# Altium PCB PCB_1.PcbDoc
Units mm, origin at the board's own origin, x right, y up, seen from the top; angles counter-clockwise.
Board outline 89.53 x 58.42 mm, 2 copper layers (Top Layer, Bottom Layer); 24 components, 16 nets, 62 pads, 11 vias.
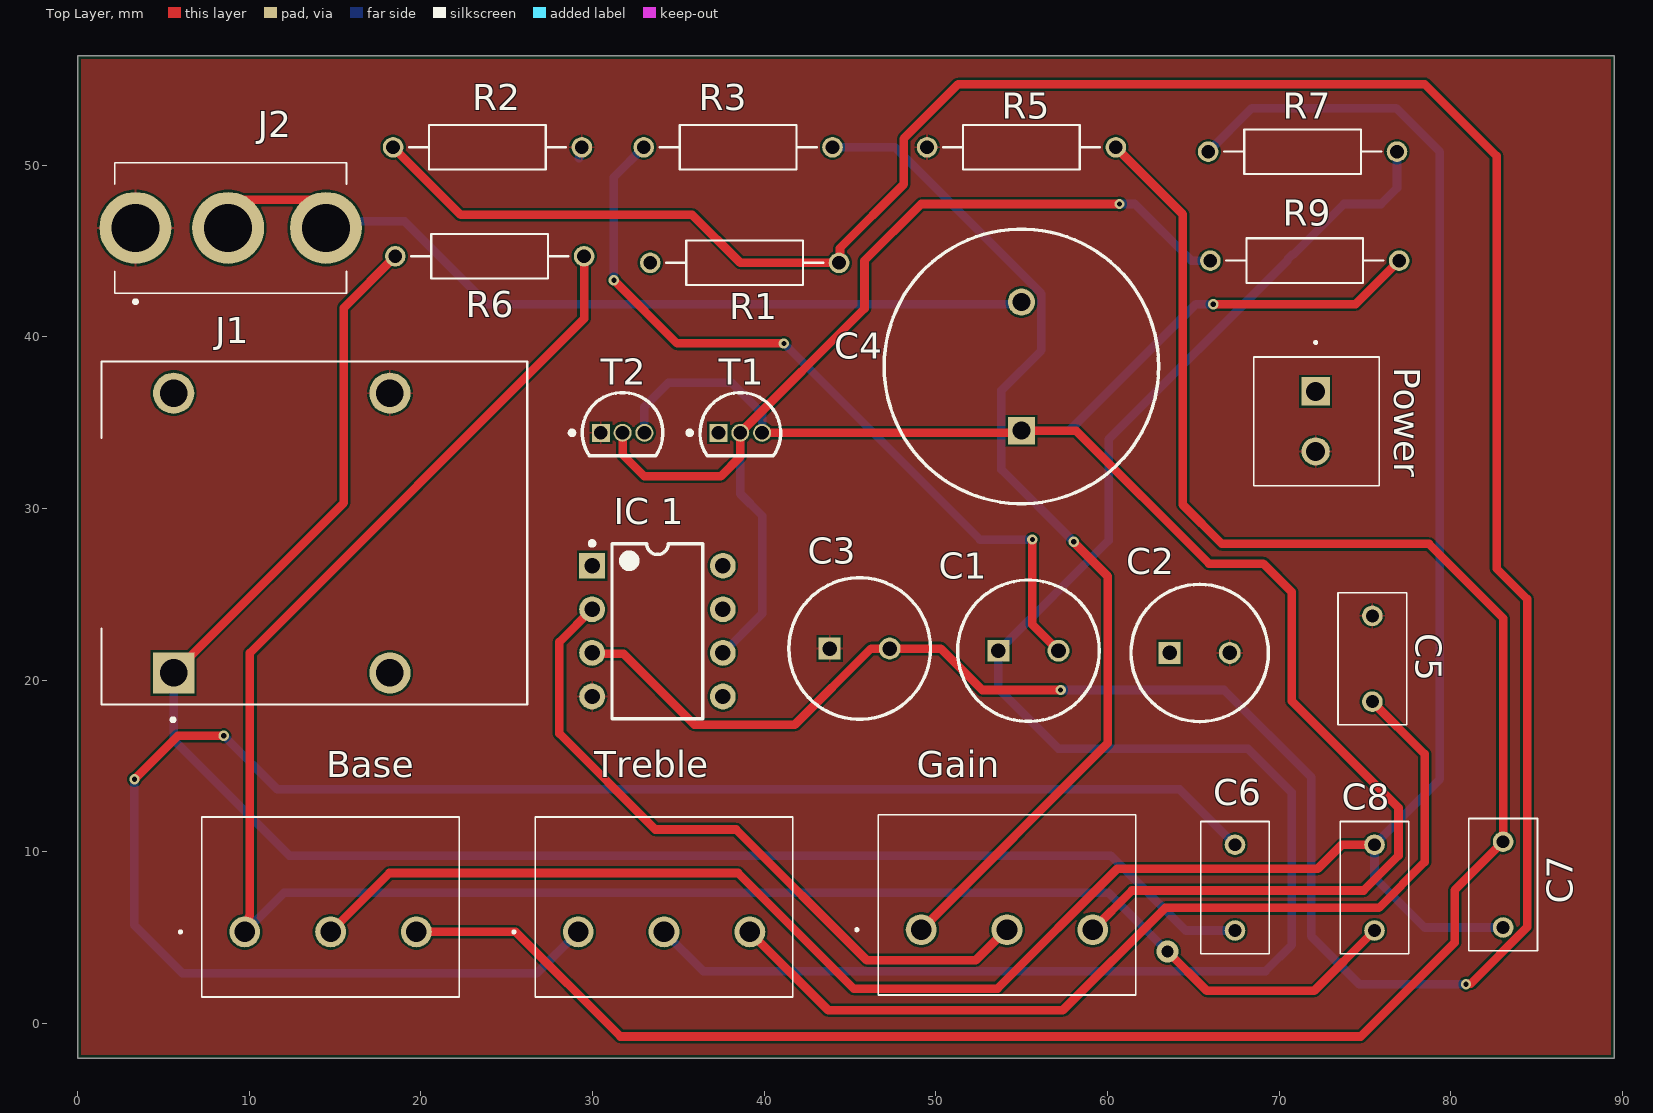
[diagram p0: Top Layer view]
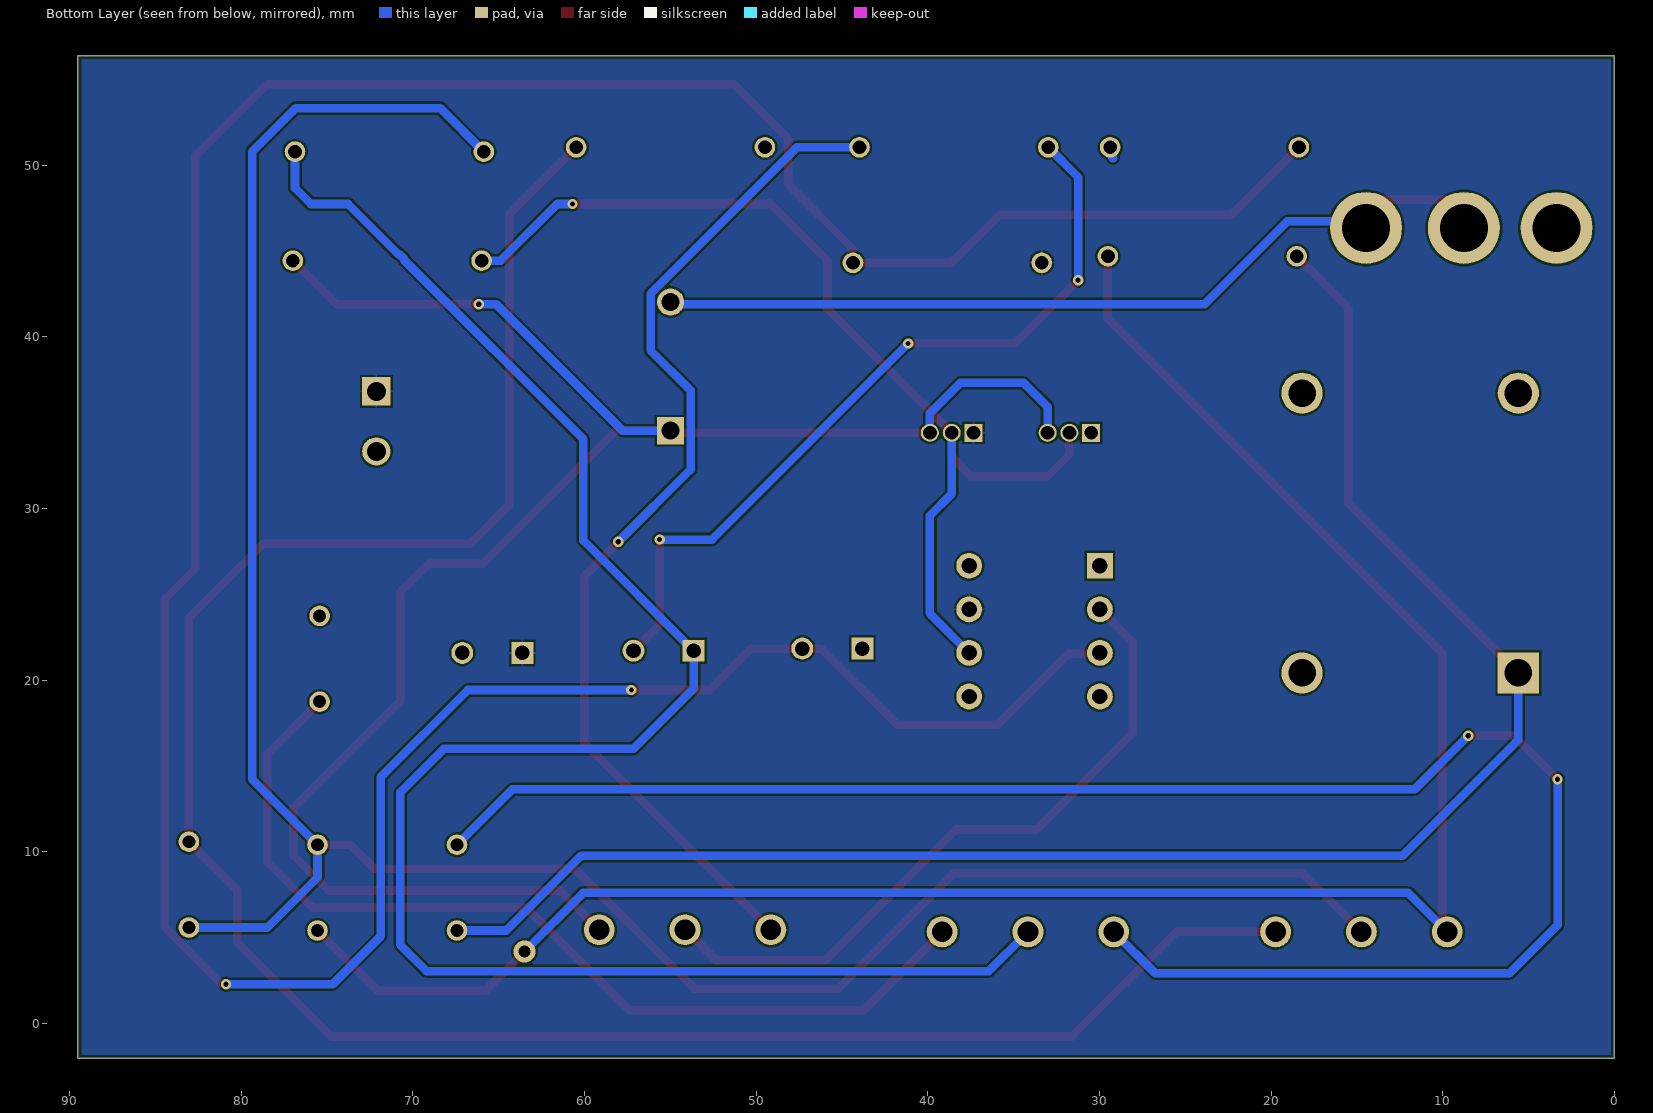
[diagram p1: Bottom Layer view, seen from below]
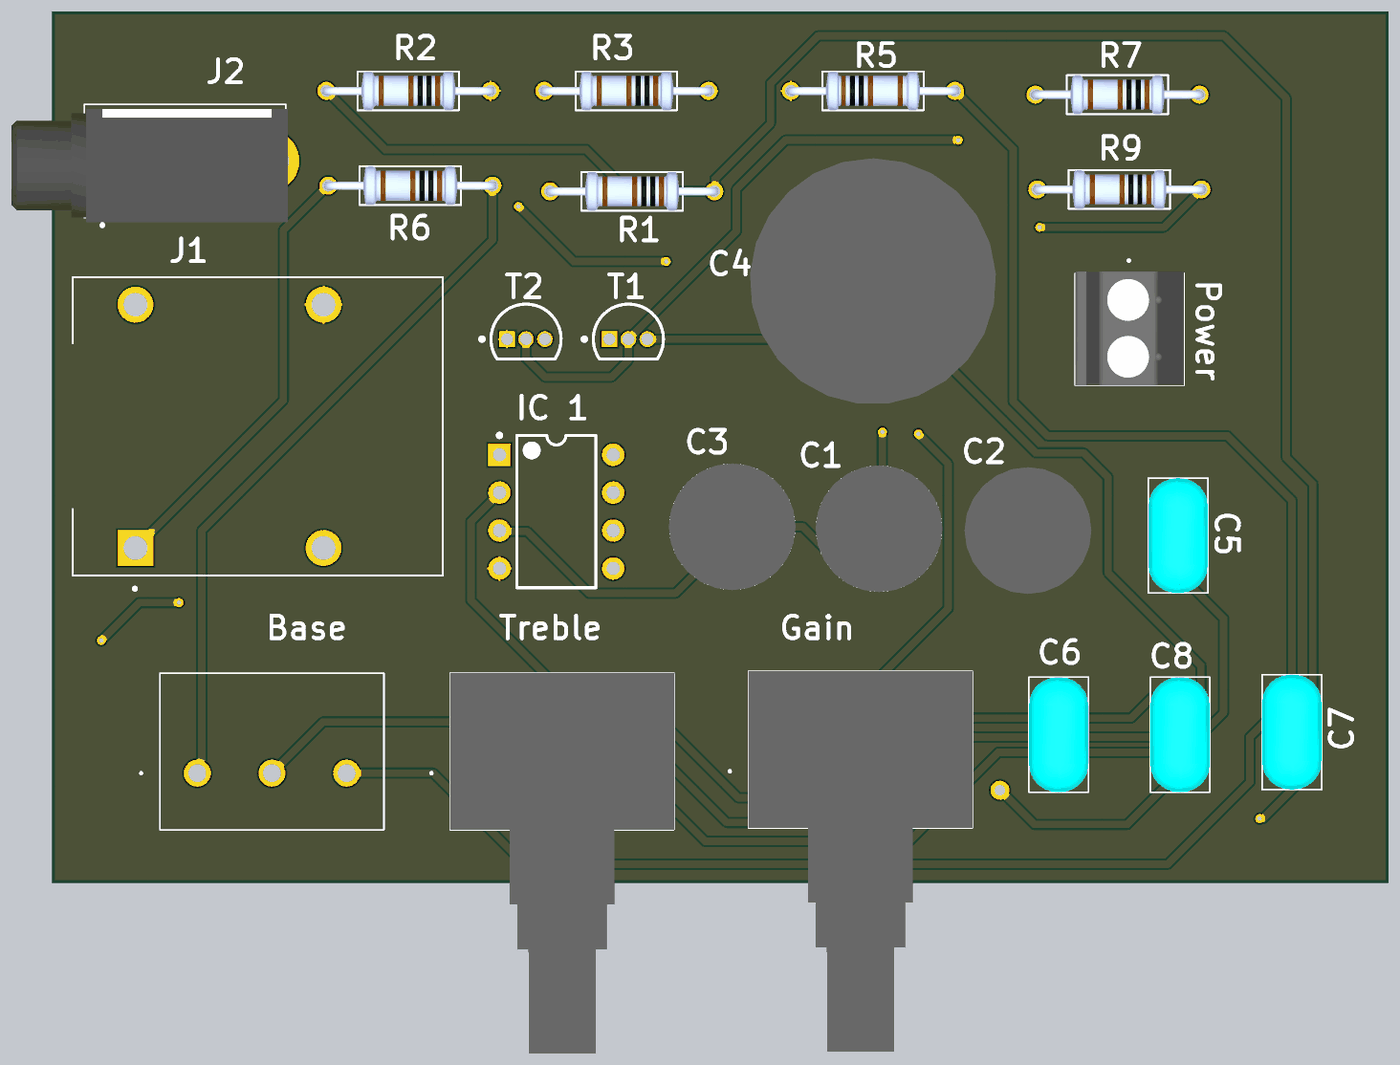
[diagram p2: 3D render of the assembled board from above, using the file's embedded part models]

## Layer stack, top to bottom
Top Solder: solder mask 0.0102, Solder Resist, Dk 3.5
Top Layer: signal copper 0.0356
Dielectric 1: dielectric 0.32, FR-4, Dk 4.8
Bottom Layer: signal copper 0.0356
Bottom Solder: solder mask 0.0102, Solder Resist, Dk 3.5

## Board outline
0,-2.032 89.535,-2.032 89.535,56.388 0,56.388

## Design rules (kind name [scope] priority, off if disabled: settings)
BoardOutlineClearance [All] p1: gap=0.2 ignorepadtopadclearanceinfootprint=FALSE
Clearance [All] p1: gap=0.127 ignorepadtopadclearanceinfootprint=FALSE except(0.25: Arc-Hole Track-Hole SMDPad-Hole THPad-Hole Via-Hole Fill-Hole Poly-Hole Region-Hole Text-Hole)
ComponentClearance [All] p1: gap=0.127 collisioncheckmode=3 verticalgap=0.127 showdistances=TRUE
DiffPairsRouting [All] p1: maxlimit=0.254 minlimit=0.127 mostfreqgap=0.127 toplayer_minwidth=0.127 toplayer_maxwidth=25.4 toplayer_prefwidth=0.127 bottomlayer_minwidth=0.127 bottomlayer_maxwidth=25.4 bottomlayer_prefwidth=0.127 maxuncoupledlength=12.7
Height [All] p1: minheight=0 maxheight=1816.048 prefheight=12.7
HoleSize [All] p1: absolutevalues=TRUE maxlimit=6.3 minlimit=0.3 maxpercent=80.000 minpercent=20.000
HoleToHoleClearance [All] p1: gap=0.25 allowstackedmicrovias=FALSE
MinimumAnnularRing [All] p1: minimumring=0.076
MinimumSolderMaskSliver [All] p1: minsoldermaskwidth=0
PlaneClearance [All] p1: clearance=0.127
PlaneConnect PlaneConnectPowerPads [InPadClass('PowerPads')] p1: planeconnectstyle=Direct reliefexpansion=0.508 reliefentries=4 reliefconductorwidth=0.254 reliefairgap=0.254
PlaneConnect [All] p2: pad.planeconnectstyle=Relief pad.reliefexpansion=0.3 pad.reliefentries=4 pad.reliefconductorwidth=0.127 pad.reliefairgap=0.127 via.planeconnectstyle=Direct via.reliefexpansion=0.3 via.reliefentries=4 via.reliefconductorwidth=0.127 via.reliefairgap=0.127
PolygonConnect PolygonConnectPowerPads [All vs (InPadClass('PowerPads'))] p1: connectstyle=Direct reliefconductorwidth=0.254 reliefentries=4 polygonreliefangle="90 Angle" airgapwidth=0.254
PolygonConnect [All] p2: thpad.connectstyle=Relief thpad.reliefconductorwidth=0.127 thpad.reliefentries=4 thpad.polygonreliefangle="90 Angle" thpad.airgapwidth=0.127 smdpad.connectstyle=Relief smdpad.reliefconductorwidth=0.127 smdpad.reliefentries=4 smdpad.polygonreliefangle="90 Angle" smdpad.airgapwidth=0.127 via.connectstyle=Direct via.reliefconductorwidth=0.127 via.reliefentries=4 via.polygonreliefangle="90 Angle" via.airgapwidth=0.127
RoutingVias [All] p1: holewidth=0.3 width=0.6 viastyle="Through Hole" minholewidth=0.3 minwidth=0.6 maxholewidth=0.6 maxwidth=6.6
SilkToSilkClearance [All] p1: silktosilkclearance=0
SilkToSolderMaskClearance [IsPad] p1: minsilkscreentomaskgap=0.127 clearancetoexposedcopper=TRUE
SolderMaskExpansion [All] p1: expansion=0.075 istentingtop=FALSE
Width [All] p1: maxlimit=0.5 minlimit=0.5 preferedwidth=0.5 minimp=50.000000 maximp=50.000000 favimp=50.000000
20 further rules are at their usual default settings.

## Components (designator, comment, footprint, x,y, rotation, side; value= is the part's Value field where it differs from the comment)
Base "RK1631110TBK" RK1631110TBK 9.732,5.334 r270 top
C1 "2.2uF" CAPPRD350W65D825H1250 53.65,21.717 r0 top
C2 "470uF" CAPPRD350W65D800H2200 63.627,21.59 r0 top
C3 "47uF" CAPPRD350W65D825H1250 43.815,21.844 r0 top
C4 "1000uF" CAPPRD750W85D1600H2200 54.991,34.537 r90 top
C5 "22nF" RCE7U2J943JUB1H03B 75.438,18.749 r90 top
C6 "2.2nF" RCE7U2J943JUB1H03B 67.437,5.414 r90 top
C7 "220nF" RCE7U2J943JUB1H03B 83.058,5.588 r90 top
C8 "22nF" RCE7U2J943JUB1H03B 75.565,5.414 r90 top
Gain "RK1631110TBK" RK1631110TBK 49.149,5.461 r270 top
"IC 1" "OPA134PA" P0008A 33.782,22.86 r0 top
J1 "SJ-63072J" CUI_SJ-63072J 5.588,28.575 r0 top
J2 "MJ-3502N" MJ3502N 3.363,46.355 r0 top
Power "1985823" 1985823 72.136,36.83 r270 top
R1 "10k" RESAD1100W55L680D260 38.862,44.323 r180 top
R2 "10k" RESAD1100W55L680D260 23.876,51.054 r180 top
R3 "10k" RESAD1100W55L680D260 38.481,51.054 r180 top
R5 "1k" RESAD1100W55L680D260 54.991,51.054 r0 top
R6 "1k" RESAD1100W55L680D260 24.003,44.704 r180 top
R7 "1k" RESAD1100W55L680D260 71.374,50.8 r180 top
R9 "560" RESAD1100W55L680D260 71.501,44.45 r180 top
T1 "BC547B" ONSC-TO-92-3-29-11 38.608,34.417 r0 top
T2 "BC557BG" ONSC-TO-92-3-29-11 31.75,34.417 r0 top
Treble "RK1631110TBK" RK1631110TBK 29.163,5.334 r270 top

## Footprints (in the part's own frame and the unit in brackets; to place one, negate y for a bottom-side part, rotate by r counter-clockwise, add the part's x,y. Pads: shape width x height; smd on the part's side, far side on the other; paste and mask are expansions set on the pad)
1985823 [mm]
  rect 1.65x1.65 hole 1.1: 1(0,0)
  round 1.65 hole 1.1: 2(3.5,0)
  silkscreen extent -2.9,-3.6 5.5,3.7, body extent -2.12,-3.6 5.5,3.7, height 9.06
CAPPRD350W65D800H2200 [mm]
  rect 1.275x1.275 hole 0.85: 1(0,0)
  round 1.275 hole 0.85: 2(3.5,0)
  silkscreen extent -2.25,-4 5.75,4, body extent -2.49,-4.25 6,4.25, height 22
CAPPRD350W65D825H1250 [mm]
  rect 1.275x1.275 hole 0.85: 1(0,0)
  round 1.275 hole 0.85: 2(3.5,0)
  silkscreen extent -2.38,-4.12 5.87,4.12, body extent -2.49,-4.25 6,4.25, height 12.5
CAPPRD750W85D1600H2200 [mm]
  rect 1.575x1.575 hole 1.05: 1(0,0)
  round 1.575 hole 1.05: 2(7.5,0)
  silkscreen extent -4.25,-8 11.75,8, body extent -4.5,-8.24 12,8.24, height 22
CUI_SJ-63072J [mm]
  rect 2.4x2.4 / inner round 2.4 / far side rect 2.4x2.4 hole 1.6: 1(0,-8.15)
  round 2.4 hole 1.6: 2(12.6,-8.15) 4(0,8.15) 5(12.6,8.15)
  silkscreen extent -4.2,-10.98 20.6,10
MJ3502N [mm]
  round 4.193 hole 2.795: 1(0,0) 2(5.4,0) 3(11.1,0)
  silkscreen extent -1.2,-4.4 12.3,3.8, body extent -6.07,-4.1 12.43,3.5, height 11.3
ONSC-TO-92-3-29-11 [mm] "TO, 3-Leads, Body Dia 4.7mm, Pitch 1.27mm"
  rect 1.05x1.05 hole 0.8: 1(-1.27,0)
  round 1.05 hole 0.8: 2(0,0) 3(1.27,0)
  silkscreen extent -3.07,-1.34 2.35,2.35, body extent -2.35,-1.33 2.36,2.36, height 7.87
P0008A [mm] "DIP, 8-Leads, Body 10.15x6.6mm, Pitch 2.54mm"
  rect 1.5x1.5 hole 0.9: 1(-3.81,3.81)
  round 1.5 hole 0.9: 2(-3.81,1.27) 3(-3.81,-1.27) 4(-3.81,-3.81) 5(3.81,-3.81) 6(3.81,-1.27) 7(3.81,1.27) 8(3.81,3.81)
  silkscreen extent -3.93,-5.1 2.65,5.23, body extent -3.95,-5.07 3.95,5.07, height 5.08
RCE7U2J943JUB1H03B [mm]
  round 1.2 hole 0.75: 1(0,0) 2(5,0)
  silkscreen extent -1.35,-2 6.35,2, body extent -1.35,-2 6.35,2, height 15.5
RESAD1100W55L680D260 [mm]
  round 1.2 hole 0.8: 1(-5.5,0) 2(5.5,0)
  silkscreen extent -4.58,-1.3 4.58,1.3, body extent -5.77,-1.3 5.77,1.3, height 2.6
RK1631110TBK [mm]
  round 1.8 hole 1.2: 1(0,0) 2(0,5) 3(0,10)
  silkscreen extent -6.7,-3.8 3.8,12.5, body extent -6.7,-2.5 18.8,12.5, height 0.25

## Part data
Base Gain Treble: "Variable Resistor", Manufacturer_Name="ALPS Electric", Mouser Part Number=688-RK1631110TBK, Datasheet Link=https://componentsearchengine.com/Datasheets/1/RK1631110TBK.pdf, Height=20.5mm, Manufacturer_Part_Number=RK1631110TBK, Mouser Price/Stock=https://www.mouser.co.uk/ProductDetail/Alps-Alpine/RK1631110TBK?qs=fQ8kcZGzY5WavbseZCL41A%3D%3D
C1: library part ECA-2VM2R2BJ, "Capacitor", Manufacturer_Name=Panasonic, Mouser Part Number=667-ECA-2VM2R2BJ, Datasheet Link=https://media.digikey.com/pdf/Data%20Sheets/Panasonic%20Electronic%20Components/ECA-xxM%20Series,TypeA.pdf, Height=12.5mm, Manufacturer_Part_Number=ECA-2VM2R2BJ, Mouser Price/Stock=https://www.mouser.co.uk/ProductDetail/Panasonic/ECA-2VM2R2BJ?qs=rMMd5vBiahqKzQ1w%252BG2Zjw%3D%3D
C2: library part EEU-FR1V471LB, "Capacitor Polarised", Manufacturer_Name=Panasonic, Mouser Part Number=667-EEU-FR1V471LB, Arrow Part Number=EEU-FR1V471LB, Arrow Price/Stock=https://www.arrow.com/en/products/eeu-fr1v471lb/panasonic?region=nac, Datasheet Link=http://industrial.panasonic.com/cdbs/www-data/pdf/RDF0000/ABA0000C1259.pdf, Height=22mm, Manufacturer_Part_Number=EEU-FR1V471LB, Mouser Price/Stock=https://www.mouser.co.uk/ProductDetail/Panasonic/EEU-FR1V471LB?qs=n1SRcuzDZT29cYaqooxsEQ%3D%3D
C3: library part ECA-2AM470BJ, "Capacitor", Manufacturer_Name=Panasonic, Mouser Part Number=667-ECA-2AM470BJ, Arrow Part Number=ECA-2AM470BJ, Arrow Price/Stock=http://www.arrow.com/en/products/eca-2am470bj/panasonic, Datasheet Link=https://media.digikey.com/pdf/Data%20Sheets/Panasonic%20Electronic%20Components/ECA-xxM%20Series,TypeA.pdf, Height=12.5mm, Manufacturer_Part_Number=ECA-2AM470BJ, Mouser Price/Stock=https://www.mouser.co.uk/ProductDetail/Panasonic/ECA-2AM470BJ?qs=rMMd5vBiahqcDuBTilH5Zg%3D%3D
C4: library part EEU-FC1V102S, "Capacitor Polarised", Manufacturer_Name=Panasonic, Mouser Part Number=667-EEU-FC1V102S, Arrow Part Number=EEU-FC1V102S, Arrow Price/Stock=https://www.arrow.com/en/products/eeu-fc1v102s/panasonic?region=nac, Datasheet Link=http://industrial.panasonic.com/cdbs/www-data/pdf/RDF0000/ABA0000C1209.pdf, Height=22mm, Manufacturer_Part_Number=EEU-FC1V102S, Mouser Price/Stock=https://www.mouser.co.uk/ProductDetail/Panasonic/EEU-FC1V102S?qs=NFmy3EUjRuVoETF2mRqKyQ%3D%3D
C5 C6 C7 C8: library part RDER72J474MUE1H03A, "Capacitor", Manufacturer_Name="Murata Electronics", Mouser Part Number=81-RDER72J474MUE1H3A, Arrow Part Number=RDER72J474MUE1H03A, Arrow Price/Stock=https://www.arrow.com/en/products/rder72j474mue1h03a/murata-manufacturing?region=nac, Datasheet Link=https://psearch.en.murata.com/capacitor/product/RDER72J474MUE1H03A.html, Height=15mm, Manufacturer_Part_Number=RDER72J474MUE1H03A, Mouser Price/Stock=https://www.mouser.co.uk/ProductDetail/Murata-Electronics/RDER72J474MUE1H03A?qs=hNud%2FORuBR3jyvfy30yvdw%3D%3D
"IC 1": library part CMP-0808-00049-2, "SoundPlus(TM) High Performance Audio Operational Amplifier, 5 to 36 V, -40 to 85 degC, 8-pin DIP (P8), Green (RoHS & no Sb/Br)", Manufacturer="Texas Instruments", Code_JEDEC=MS-001, ComponentLink1Description="Manufacturer URL", ComponentLink1URL=http://www.ti.com/, ComponentLink2Description=Datasheet, ComponentLink2URL=http://www.ti.com/general/docs/lit/getliterature.tsp?genericPartNumber=OPA134&fileType=pdf, ComponentLink3Description="Package Specification", ComponentLink3URL=http://www.ti.com/litv/pdf/mpdi001b, DatasheetVersion=SBOS058, Eco-Plan="Green (RoHS & no Sb/Br)", GBW(Typ)(MHz)=8, Iq per channel(Max)(mA)=5, Mounting Technology="Through Hole", Number of Channels=1, PackageDescription="8-Pin Plastic In-Line, Body 9.59 x 6.35 mm, Pitch 2.54 mm", PackageReference=P0008A, PackageVersion="4040082/E, 04/2010", PartNumber=OPA134PA, SubFamily="Audio Operational Amplifier", Vmax(V)=36, Vmin(V)=5, Vn at Flatband(Typ)(nV/rtHz)=8
J1: Package=None, Availability=Unavailable, MP=SJ-63072J, Price=None
J2: "Connector", Manufacturer_Name="CUI Devices", Mouser Part Number=490-MJ-3502N, Arrow Part Number=MJ-3502N, Arrow Price/Stock=https://www.arrow.com/en/products/mj-3502n/cui-devices?region=nac, Datasheet Link=https://www.cui.com/product/resource/mj-3502n.pdf, Height=11.3mm, Manufacturer_Part_Number=MJ-3502N, Mouser Price/Stock=https://www.mouser.co.uk/ProductDetail/CUI-Devices/MJ-3502N?qs=WyjlAZoYn51%252Bghx31AcijA%3D%3D
Power: "Connector", Manufacturer_Name="Phoenix Contact", Mouser Part Number=651-1985823, Arrow Part Number=1985823, Arrow Price/Stock=https://www.arrow.com/en/products/1985823/phoenix-contact?region=nac, Datasheet Link=http://www.phoenixcontact.com/gb/produkte/1985823, Height=8.65mm, Manufacturer_Part_Number=1985823, Mouser Price/Stock=https://www.mouser.co.uk/ProductDetail/Phoenix-Contact/1985823?qs=YbgdthCBnKeJF1NhvxNKlA%3D%3D
R1 R2 R3 R5 R6 R7 R9: library part MFR-25FBF52-1K, "1.07 kOhms Â±1% 0.25W, 1/4W Through Hole Resistor Axial - Metal Film", Package="Axial Yageo", Availability="In Stock", Check_prices=https://www.snapeda.com/parts/MFR-25FBF52-1K/Yageo/view-part/?ref=eda, MF=Yageo, MP=MFR-25FBF52-1K, Price=None, Purchase-URL=https://pricing.snapeda.com/search/part/MFR-25FBF52-1K/?ref=eda, SnapEDA_Link=https://www.snapeda.com/parts/MFR-25FBF52-1K/Yageo/view-part/?ref=snap
T1: library part CMP-1048-01467-1, "Amplifier Transistor, NPN Silicon, 3-Pin TO-92, Bulk Box", Manufacturer="On Semiconductor", ComponentLink1Description="Manufacturer URL", ComponentLink1URL=http://www.onsemi.com/, ComponentLink2Description=Datasheet, ComponentLink2URL=http://www.onsemi.com/pub_link/Collateral/BC546-D.PDF, ComponentLink3Description="Package Specification", ComponentLink3URL=http://www.onsemi.cn/pub_link/Collateral/2N6426-D.PDF, DatasheetVersion="Rev. 7", fT Min (MHz)=150, IC Continuous (A)=0.1, Mounting Technology="Through Hole", PackageDescription="3-Pin Transistor Outline, Body 4.825 x 3.685 mm, Pitch 1.27 mm", PackageReference=TO-92-3-29-11_AM_SL, PackageVersion="Rev. AM", Packing="Bulk Box", PartNumber=BC547B, Polarity=NPN, RoHS=FALSE
T2: library part CMP-1048-01440-1, "Amplifier Transistor, PNP Silicon, 3-Pin TO-92, Pb-Free, Bulk Box", Manufacturer="On Semiconductor", ComponentLink1Description="Manufacturer URL", ComponentLink1URL=http://www.onsemi.com/, ComponentLink2Description=Datasheet, ComponentLink2URL=http://www.onsemi.com/pub_link/Collateral/BC556B-D.PDF, ComponentLink3Description="Package Specification", ComponentLink3URL=http://www.onsemi.cn/pub_link/Collateral/2N6426-D.PDF, DatasheetVersion="Rev. 3", IC Continuous (A)=-0.1, Mounting Technology="Through Hole", PackageDescription="3-Pin Transistor Outline, Body 4.825 x 3.685 mm, Pitch 1.27 mm", PackageReference=TO-92-3-29-11_AM_SL, PackageVersion="Rev. AM", Packing="Bulk Box", PartNumber=BC557BG, Polarity=PNP, RoHS=TRUE

## Via types
v1: diameter 0.6, hole 0.3, Top Layer to Bottom Layer, 10 vias
v2: diameter 1.27, hole 0.711, Top Layer to Bottom Layer, 1 vias

## Nets (pads, with @x,y where several pads share a name; then routed paths per layer and width w, separated by ;. In a path a pad name is that pad's centre, name@x,y a point inside that pad or via, vN(x,y) a via of type N, cw(c..) or ccw(c..) an arc to the next point about the centre after c; other vN are vias at no path point)
GND: "IC 1.4" C2.2 C3.1 C5.2 J1.5 J2.1 Power.2 R2.1 R5.1 T2.1 | length 1.3
  Bottom Layer w0.5: 29.21,50.411 29.242,50.443 29.242,50.92 R2.1 ; T2.1@30.226,34.671 T2.1 ; C5.2 C5.2@75.565,23.876
IN: C6.1 J1.1 R6.2 | length 100
  Top Layer w0.5: J1.1 15.494,30.331 15.494,41.695 R6.2
  Bottom Layer w0.5: J1.1 5.588,16.51 12.319,9.779 60.198,9.779 64.563,5.414 C6.1
NetC1_2: C1.2 R3.2 | length 46.2
  Top Layer w0.5: v1(31.242,43.307) 34.925,39.624 v1(41.148,39.624) ; v1(55.626,28.194) 55.626,23.241 C1.2
  Bottom Layer w0.5: v1(31.242,43.307) 31.242,49.315 R3.2 ; v1(41.148,39.624) 52.578,28.194 v1(55.626,28.194)
NetC3_2: "IC 1.3" C3.2 R1.1 R2.2 | length 193.8
  Top Layer w0.5: R2.2 22.313,47.117 35.814,47.117 38.608,44.323 R1.1 44.416,44.377 44.416,45.178 48.133,48.895 48.133,51.562 51.308,54.737 78.486,54.737 82.677,50.546 82.677,26.51 84.455,24.732 84.455,5.603 81.157,2.305 80.918,2.305 v1(80.899,2.286) ; 29.972,21.59 30.025,21.537 31.803,21.537 35.941,17.399 41.783,17.399 46.228,21.844 C3.2 ; C3.2@47.36,21.844 50.292,21.844 52.705,19.431 v1(57.277,19.431)
  Bottom Layer w0.5: v1(57.277,19.431) 66.802,19.431 71.882,14.351 71.882,5.08 74.676,2.286 v1(80.899,2.286)
"NetIC 1_6": "IC 1.6" R9.2 T1.2 T2.2 | length 60.7
  Top Layer w0.5: T2.2 31.75,33.147 33.02,31.877 37.465,31.877 38.608,33.02 T1.2 38.608,34.423 45.847,41.662 45.847,44.45 49.149,47.752 v1(60.706,47.752)
  Bottom Layer w0.5: 37.592,21.59 39.878,23.876 39.878,29.591 38.608,30.861 T1.2 ; v1(60.706,47.752) 61.595,47.752 64.897,44.45 R9.2
OUT: C4.2 J2.2 J2.3 | length 49.2
  Top Layer w0.5: J2.2@9.144,48.006 J2.3@14.844,48.006
  Bottom Layer w0.5: J2.3@13.574,46.736 19.05,46.736 23.876,41.91 54.864,41.91 C4.2
To-1k: Base.2 C7.1 C8.2 R7.2 | length 136.7
  Top Layer w0.5: Base.2 18.161,8.763 38.481,8.763 45.212,2.032 53.594,2.032 60.579,9.017 72.263,9.017 73.66,10.414 C8.2
  Bottom Layer w0.5: R7.2 68.414,53.34 76.835,53.34 79.375,50.8 79.375,14.224 C8.2 75.565,8.509 78.486,5.588 C7.1
V1_1: Gain.1 R3.1 | length 60.8
  Top Layer w0.5: Gain.1 60.025,16.337 60.025,26.054 58.039,28.04 v1(58.039,28.067)
  Bottom Layer w0.5: R3.1 47.621,51.054 56.156,42.519 56.156,39.221 53.826,36.892 53.826,32.28 v1(58.039,28.067)
V1_2: "IC 1.2" Gain.2 | length 40.3
  Top Layer w0.5: 29.972,24.13 28.067,22.225 28.067,16.891 33.658,11.3 38.357,11.3 45.974,3.683 52.326,3.683 54.104,5.461 Gain.2
V1_3: C4.1 Gain.3 R9.1 T1.3 T2.3 | length 109.3
  Top Layer w0.5: T1.3 54.871,34.417 C4.1 58.173,34.537 65.913,26.797 69.088,26.797 70.739,25.146 70.739,18.789 76.962,12.566 76.962,9.779 74.93,7.747 61.435,7.747 Gain.3 ; v1(66.167,41.91) 74.461,41.91 R9.1
  Bottom Layer w0.5: T2.3 33.02,35.941 34.417,37.338 38.1,37.338 39.878,35.56 T1.3 ; C4.1 57.778,34.537 65.151,41.91 v1(66.167,41.91)
V2_1: C6.2 Treble.1 | length 104.1
  Top Layer w0.5: v1(3.302,14.224) 5.842,16.764 v1(8.509,16.764)
  Bottom Layer w0.5: v1(3.302,14.224) 3.302,5.715 6.096,2.921 26.75,2.921 Treble.1 ; v1@8.7,16.573 11.627,13.646 64.205,13.646 C6.2
V2_2: C1.1 R7.1 Treble.2 | length 108.9
  Bottom Layer w0.5: Treble.2 36.449,3.048 69.215,3.048 70.739,4.572 70.739,13.462 68.199,16.002 57.15,16.002 53.65,19.502 C1.1 60.071,28.138 60.071,34.036 70.504,44.469 70.504,44.538 70.797,44.831 70.866,44.831 73.787,47.752 75.946,47.752 76.874,48.68 R7.1
V2_3: C5.1 Treble.3 | length 55.4
  Top Layer w0.5: Treble.3 43.735,0.762 57.404,0.762 63.373,6.731 75.819,6.731 78.486,9.398 78.486,15.701 C5.1
V3_1: Base.1 C8.1 R6.1 | length 118.2
  Top Layer w0.5: Base.1 9.981,5.583 9.981,6.225 10.033,6.277 10.033,21.59 29.503,41.06 R6.1 ; v2(63.5,4.191) 65.786,1.905 72.056,1.905 C8.1
  Bottom Layer w0.5: Base.1 12.018,7.62 60.071,7.62 v2(63.5,4.191)
V3_3: Base.3 C7.2 R5.2 | length 129.2
  Top Layer w0.5: Base.3 25.527,5.334 31.623,-0.762 74.764,-0.762 80.241,4.715 80.241,7.771 C7.2 83.058,23.622 78.74,27.94 66.675,27.94 64.389,30.226 64.389,47.156 R5.2
VCC: "IC 1.7" C2.1 Power.1 R1.2 T1.1
pads on no net: "IC 1.1" "IC 1.5" "IC 1.8" J1.2 J1.4

## Polygon pours and split planes (outlines as drawn)
VCC on Bottom Layer "VCC_L02_P001" (solid, pour order 1): 0,56.388 89.127,56.388 89.307,56.568 89.307,-1.852 0.407,-1.852 0.28,-1.979 0,-1.698
GND on Top Layer "GND_L01_P000" (solid, pour order 0): -0.13,56.388 89.405,56.388 89.532,56.261 89.532,-2.032 0.124,-2.032 -0.003,-2.159 -0.13,-2.032 -0.13,56.515